# EAGLE board saturn_frontend_rv2 (EAGLE 7.7.0)
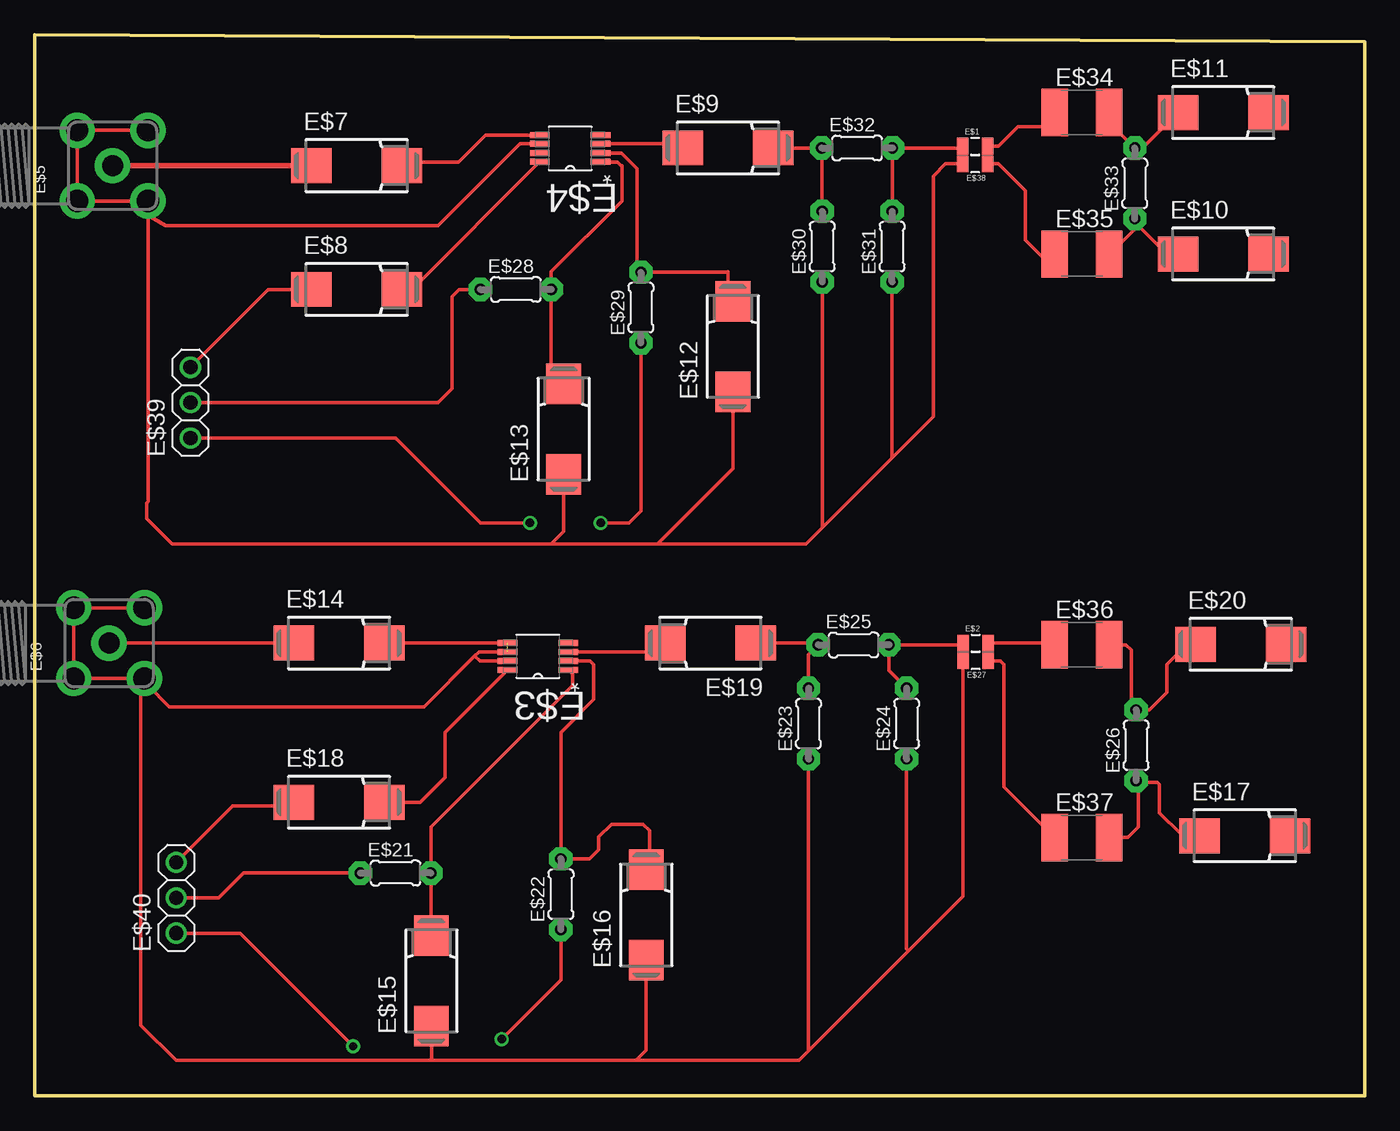
[diagram p0: board, top side]
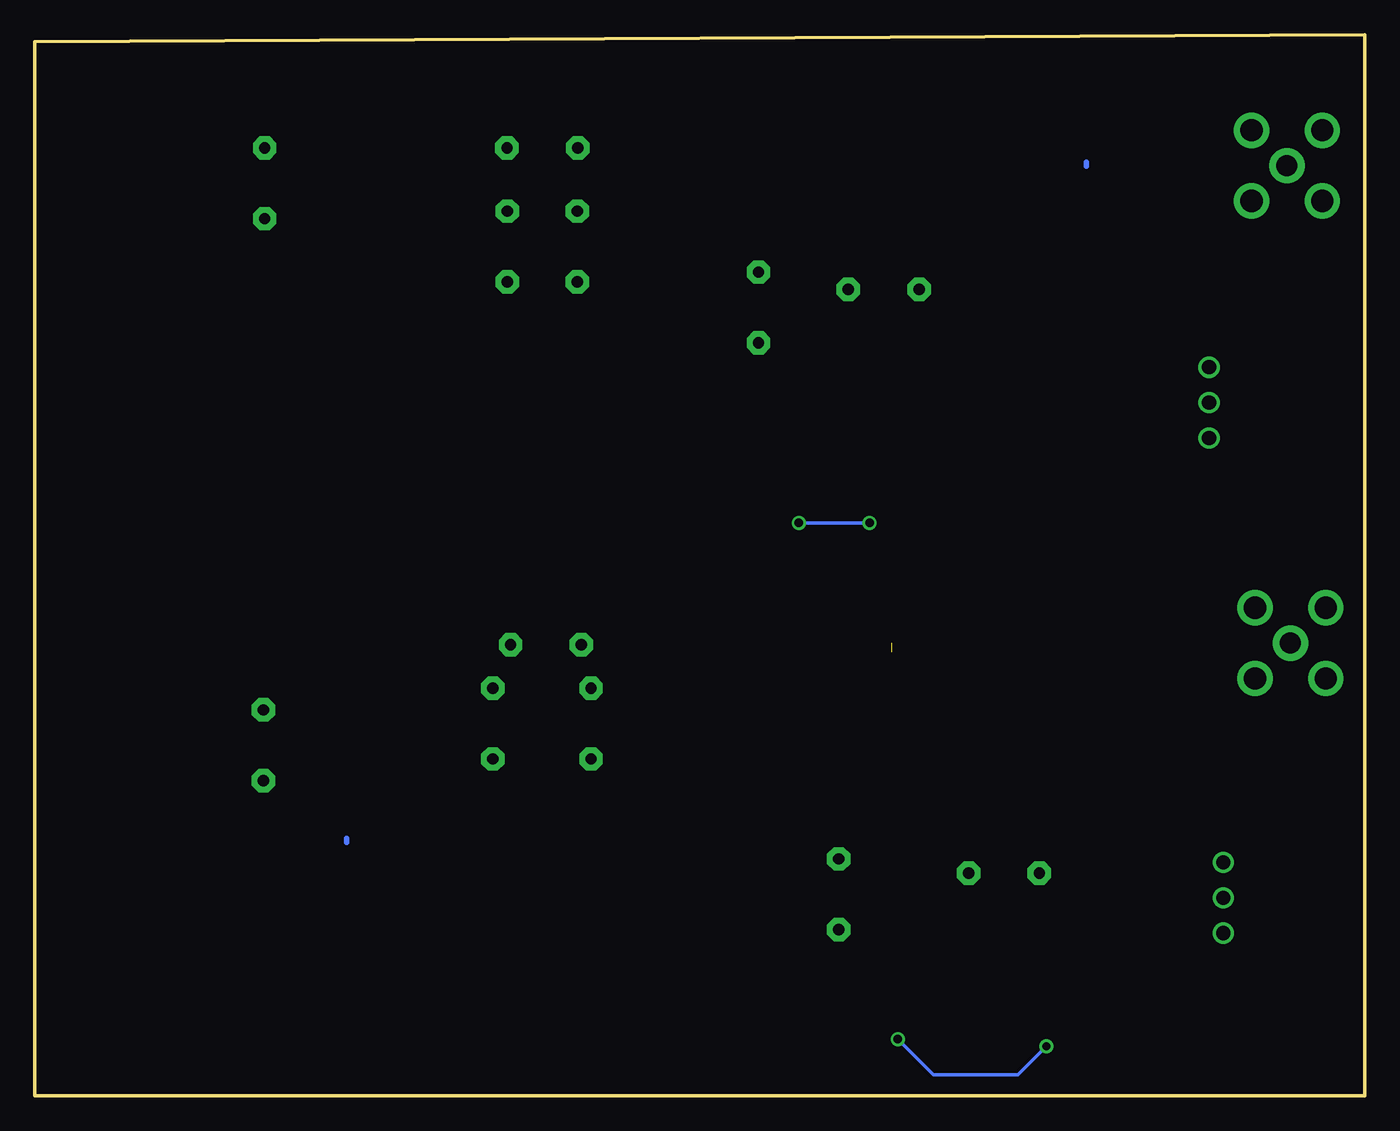
[diagram p1: board, bottom side, seen from below]

Size 95.5 x 76.2 mm. Coordinates in mm from the lower left corner, seen from the top.
Outline: 0,76.2 0,0 95.5,0 95.5,75.69 0,76.2
Copper layers (1*16): Top 0.035mm / dielectric 1.5mm / Bottom 0.035mm
Design rules "default": minimum track width 10mil, minimum drill 24mil, track to track 8mil, track to pad 8mil, pad to pad 8mil, via to via 8mil, smd to smd 8mil, copper to edge 40mil, drill to drill 8mil, minimum pad ring 10mil, minimum via ring 8mil, stop-mask expansion 4mil, vias tented up to drill 0mil, thermal gap 10mil

## Footprints (pad centres in the part's own frame; a part is rotated, then mirrored left to right if it is on the bottom)
0805 = smd 0.8 x 1.2: 1 -0.9,0; 2 0.9,0
SOP65P490X110-8N = smd 1.422 x 0.432: 1 -2.184,0.965; 2 -2.184,0.33; 3 -2.184,-0.33; 4 -2.184,-0.965; 5 2.184,-0.965; 6 2.184,-0.33; 7 2.184,0.33; 8 2.184,0.965
SMA90_DIP = drill 1.5 pad 2.54: ANTENNA 0,0 | drill 1.6 pad 2.54: GND1 -2.54,2.54; GND2 2.54,2.54; GND3 -2.54,-2.54; GND4 2.54,-2.54
085CS_1AR = smd 2.9 x 2.5: + 3.25,0; - -3.25,0
0204/5 = drill 0.813 pad 1.676 octagon: 1 -2.54,0; 2 2.54,0
L1812 = smd 1.9 x 3.4: 1 -1.95,0; 2 1.95,0
1X03 = drill 1.016: 1 -2.54,0; 2 0,0; 3 2.54,0

## Placement (x,y rotation side)
E$1  [0805]  67.53,68.2 0 top
E$2  [0805]  67.56,32.51 0 top
E$3  [SOP65P490X110-8N]  36.13,31.56 180 top
E$4  [SOP65P490X110-8N]  38.45,68.04 180 top
E$5  [SMA90_DIP]  5.59,66.8 90 top
E$6  [SMA90_DIP]  5.33,32.51 90 top
E$7  100 pF  [085CS_1AR]  23.11,66.8 0 top
E$8  100 pF  [085CS_1AR]  23.11,57.91 0 top
E$9  100 pF  [085CS_1AR]  49.78,68.07 0 top
E$10  100 pF  [085CS_1AR]  85.34,60.45 0 top
E$11  100 pF  [085CS_1AR]  85.34,70.61 0 top
E$12  100 pF  [085CS_1AR]  50.13,53.82 90 top
E$13  100 pF  [085CS_1AR]  37.97,47.88 90 top
E$14  100 pF  [085CS_1AR]  21.84,32.51 0 top
E$15  100 pF  [085CS_1AR]  28.48,8.25 90 top
E$16  100 pF  [085CS_1AR]  43.91,12.99 90 top
E$17  100 pF  [085CS_1AR]  86.9,18.67 0 top
E$18  100 pF  [085CS_1AR]  21.84,21.08 0 top
E$19  100 pF  [085CS_1AR]  48.51,32.51 180 top
E$20  100 pF  [085CS_1AR]  86.61,32.42 0 top
E$21  100 Ohm  [0204/5]  25.91,16 0 top
E$22  100 Ohm  [0204/5]  37.78,14.48 90 top
E$23  221 Ohm  [0204/5]  55.56,26.73 90 top
E$24  221 Ohm  [0204/5]  62.61,26.73 90 top
E$25  23.7 Ohm  [0204/5]  58.8,32.38 0 top
E$26  93.7 Ohm  [0204/5]  79.09,25.18 90 top
E$27  [0805]  67.56,31.24 180 top
E$28  100 Ohm  [0204/5]  34.54,57.91 0 top
E$29  100 Ohm  [0204/5]  43.53,56.61 90 top
E$30  221 Ohm  [0204/5]  56.55,60.99 90 top
E$31  221 Ohm  [0204/5]  61.56,60.99 90 top
E$32  23.7 Ohm  [0204/5]  59.05,68.07 0 top
E$33  93.7 Ohm  [0204/5]  78.99,65.53 90 top
E$34  1.0 nH  [L1812]  75.18,70.61 0 top
E$35  1.0 nH  [L1812]  75.18,60.45 0 top
E$36  1.0 nH  [L1812]  75.18,32.38 0 top
E$37  1.0 nH  [L1812]  75.18,18.54 0 top
E$38  [0805]  67.53,66.93 180 top
E$39  [1X03]  11.18,49.78 90 top
E$40  [1X03]  10.16,14.22 90 top

## Library data of the parts
E$1 E$2 E$27 E$38 = 0805
E$3 E$4 = SOP65P490X110-8N
E$5-E$26 E$28-E$33 E$39 E$40 = adafruit
E$34-E$37 = eagle-ltspice

## Nets
S$2: E$5.ANTENNA E$7.-
S$3: E$4.5
S$4: E$4.8 E$8.+
S$5: E$4.3
S$6: E$4.1 E$13.+ E$28.2
S$7: E$4.2 E$12.+ E$29.2
S$8: E$4.6 E$5.GND1 E$5.GND2 E$5.GND3 E$5.GND4 E$30.1 E$31.1 E$38.2
S$9: E$9.+ E$30.2 E$32.1
S$10: E$1.1 E$31.2 E$32.2
S$11: E$1.2
S$12: E$38.1
S$13: E$11.- E$33.2 E$34.2
S$14: E$33.1 E$35.2
S$15: E$6.ANTENNA
S$17: E$3.5 E$3.6 E$3.7 E$6.GND1 E$6.GND2 E$6.GND3 E$6.GND4 E$14.+ E$15.- E$16.- E$23.1 E$24.1 E$27.2
S$18: E$3.8 E$18.+
S$19: E$3.3
S$20: E$3.1 E$21.2
S$21: E$3.2 E$22.2
S$22: E$19.- E$23.2 E$25.1
S$23: E$2.1 E$24.2 E$25.2
S$24: E$2.2 E$36.1
S$25: E$27.1 E$37.1
S$26: E$26.2 E$36.2
S$27: E$26.1 E$37.2
S$29: E$8.- E$39.3
S$30: E$28.1 E$39.2
S$31: E$29.1 E$39.1
S$32: E$18.- E$40.3
S$33: E$21.1 E$40.2
S$34: E$22.1 E$40.1
S$35: E$12.-
S$36: E$13.-
S$37: E$9.-

## Tracks (layer width: path | path; a pad name or v marks a point on that pad's centre or on a via)
S$1
  Bottom 0.406: 73.12,18.48 73.12,18.19
S$2
  Top 0.406: E$5.ANTENNA E$7.-
S$3
  Top 0.254: E$4.5 32.38,69 30.43,67.06 27.69,67.06
S$4
  Top 0.254: E$8.+ 27.1,57.91 E$4.8
S$5
  Top 0.254: E$4.3 45.92,68.37 45.97,68.43
S$6
  Top 0.254: E$13.+ 37.08,52.02 E$28.2 37.08,59.18 42.16,64.26 42.16,66.8 42.11,66.8 41.86,67.06 40.65,67.06 E$4.1
S$7
  Top 0.254: E$12.+ 49.78,57.42 49.78,59.18 49.75,59.15 E$29.2 43.23,59.45 43.23,66.6 42.12,67.71 E$4.2
S$8
  Top 0.254: E$5.GND3 8.13,42.67 8.03,42.57 8.03,41.45 9.85,39.62 55.37,39.62 56.55,40.8 | E$31.1 61.56,45.81 | 61.56,45.81 56.55,40.8 | E$30.1 56.55,40.8 | E$38.2 65.41,66.93 64.52,66.04 64.52,48.77 61.56,45.81 | E$5.GND4 E$5.GND2 E$5.GND1 E$5.GND3 | E$5.GND3 6.99,63.88 9.4,62.48 28.96,62.48 34.84,68.37 E$4.6
S$9
  Top 0.254: E$9.+ E$32.1 56.52,63.56 E$30.2
S$10
  Top 0.254: E$31.2 61.59,63.56 E$32.2 66.5,68.07 E$1.1
S$11
  Top 0.254: E$1.2 69.22,68.2 70.61,69.6 72.64,69.6 73.15,70.1
S$12
  Top 0.254: E$38.1 69.22,66.93 71.12,65.02 71.12,61.47 72.64,59.94
S$13
  Top 0.254: E$34.2 77.13,69.93 E$33.2 79.55,68.07 E$11.-
S$14
  Top 0.254: E$33.1 78.99,62.74 79.25,62.48 | 79.25,62.48 81.28,60.45 | E$35.2 77.22,60.45 79.25,62.48
S$15
  Top 0.254: E$6.ANTENNA 18.29,32.51
S$16
  Bottom 0.406: 19.97,66.77 19.97,67.06
S$17  (1 unrouted)
  Top 0.254: E$14.+ E$3.5 | E$15.- 28.48,2.57 28.45,2.54 | E$6.GND3 8.13,29.72 8.13,29.46 9.65,27.94 27.94,27.94 31.6,31.6 | E$16.- 43.91,3.27 43.18,2.54 | 43.18,2.54 28.45,2.54 | 31.6,31.6 31.89,31.89 E$3.6 | E$23.1 55.56,3.24 | 55.56,3.24 54.86,2.54 43.18,2.54 | E$27.2 66.66,14.34 62.74,10.41 | 62.74,10.41 55.56,3.24 | E$24.1 62.61,10.54 62.74,10.41 | E$6.GND4 E$6.GND2 E$6.GND1 E$6.GND3 | 28.45,2.54 10.16,2.54 7.62,5.08 7.62,29.72 E$6.GND3 | E$3.7 31.97,31.23 31.6,31.6
S$18
  Top 0.254: E$18.+ 27.69,21.08 29.46,22.86 29.46,26.11 E$3.8
S$19
  Top 0.254: E$3.3 44.59,31.89 44.7,32
S$20
  Top 0.254: E$3.1 38.61,30.3 38.61,29.46 28.45,19.3 E$21.2 28.45,12.8 28.6,12.65
S$21
  Top 0.254: 44.14,17.22 44.14,19.05 43.69,19.51 41.4,19.51 40.49,18.59 40.49,17.68 39.83,17.02 E$22.2 37.78,26.1 40.13,28.45 40.13,30.99 39.89,31.23 E$3.2
S$22
  Top 0.254: E$19.- 56.13,32.51 E$25.1 55.56,31.69 E$23.2
S$23
  Top 0.254: E$24.2 61.34,30.54 E$25.2 66.54,32.38 E$2.1
S$24
  Top 0.254: E$2.2 73.11,32.51 E$36.1
S$25
  Top 0.254: E$27.1 69.34,31.24 69.6,30.99 69.6,22.18 E$37.1
S$26
  Top 0.254: E$36.2 78.36,32.38 78.74,32 78.74,28.07 E$26.2 80.04,27.72 81.28,28.96 81.28,30.99 82.8,32.51
S$27
  Top 0.254: E$37.2 78.49,18.54 79.25,19.3 79.25,22.48 E$26.1 79.09,22.51 80.61,22.51 80.77,22.35 80.77,20.32 82.3,18.8
S$29
  Top 0.254: E$8.- 16.76,57.91 E$39.3
S$30
  Top 0.254: E$28.1 30.48,57.91 29.97,57.4 29.97,50.8 28.96,49.78 E$39.2
S$31  (via drill 0.6)
  Top 0.254: E$29.1 43.53,42.01 42.67,41.15 v40.64,41.15 | v35.56,41.15 32,41.15 25.91,47.24 E$39.1
  Bottom 0.254: v40.64,41.15 v35.56,41.15
S$32
  Top 0.254: E$40.3 14.22,20.83 18.34,20.83 E$18.-
S$33
  Top 0.254: E$21.1 14.99,16 13.21,14.22 E$40.2
S$34  (via drill 0.6)
  Top 0.254: E$22.1 37.78,8.32 v33.53,4.06 | v22.86,3.56 14.73,11.68 E$40.1
  Bottom 0.254: v33.53,4.06 30.99,1.52 24.89,1.52 v22.86,3.56
S$35
  Top 0.254: E$12.- 50.13,45.05 44.7,39.62
S$36
  Top 0.254: E$13.- 37.97,40.51 37.08,39.62
S$37
  Top 0.254: 46.24,68.37 E$9.-